# Altium PCB main.PcbDoc
Units mm, origin at the board's own origin, x right, y up, seen from the top; angles counter-clockwise.
Board outline 81 x 69.5 mm, 2 copper layers (Top Layer, Bottom Layer); 105 components, 70 nets, 326 pads, 352 vias.
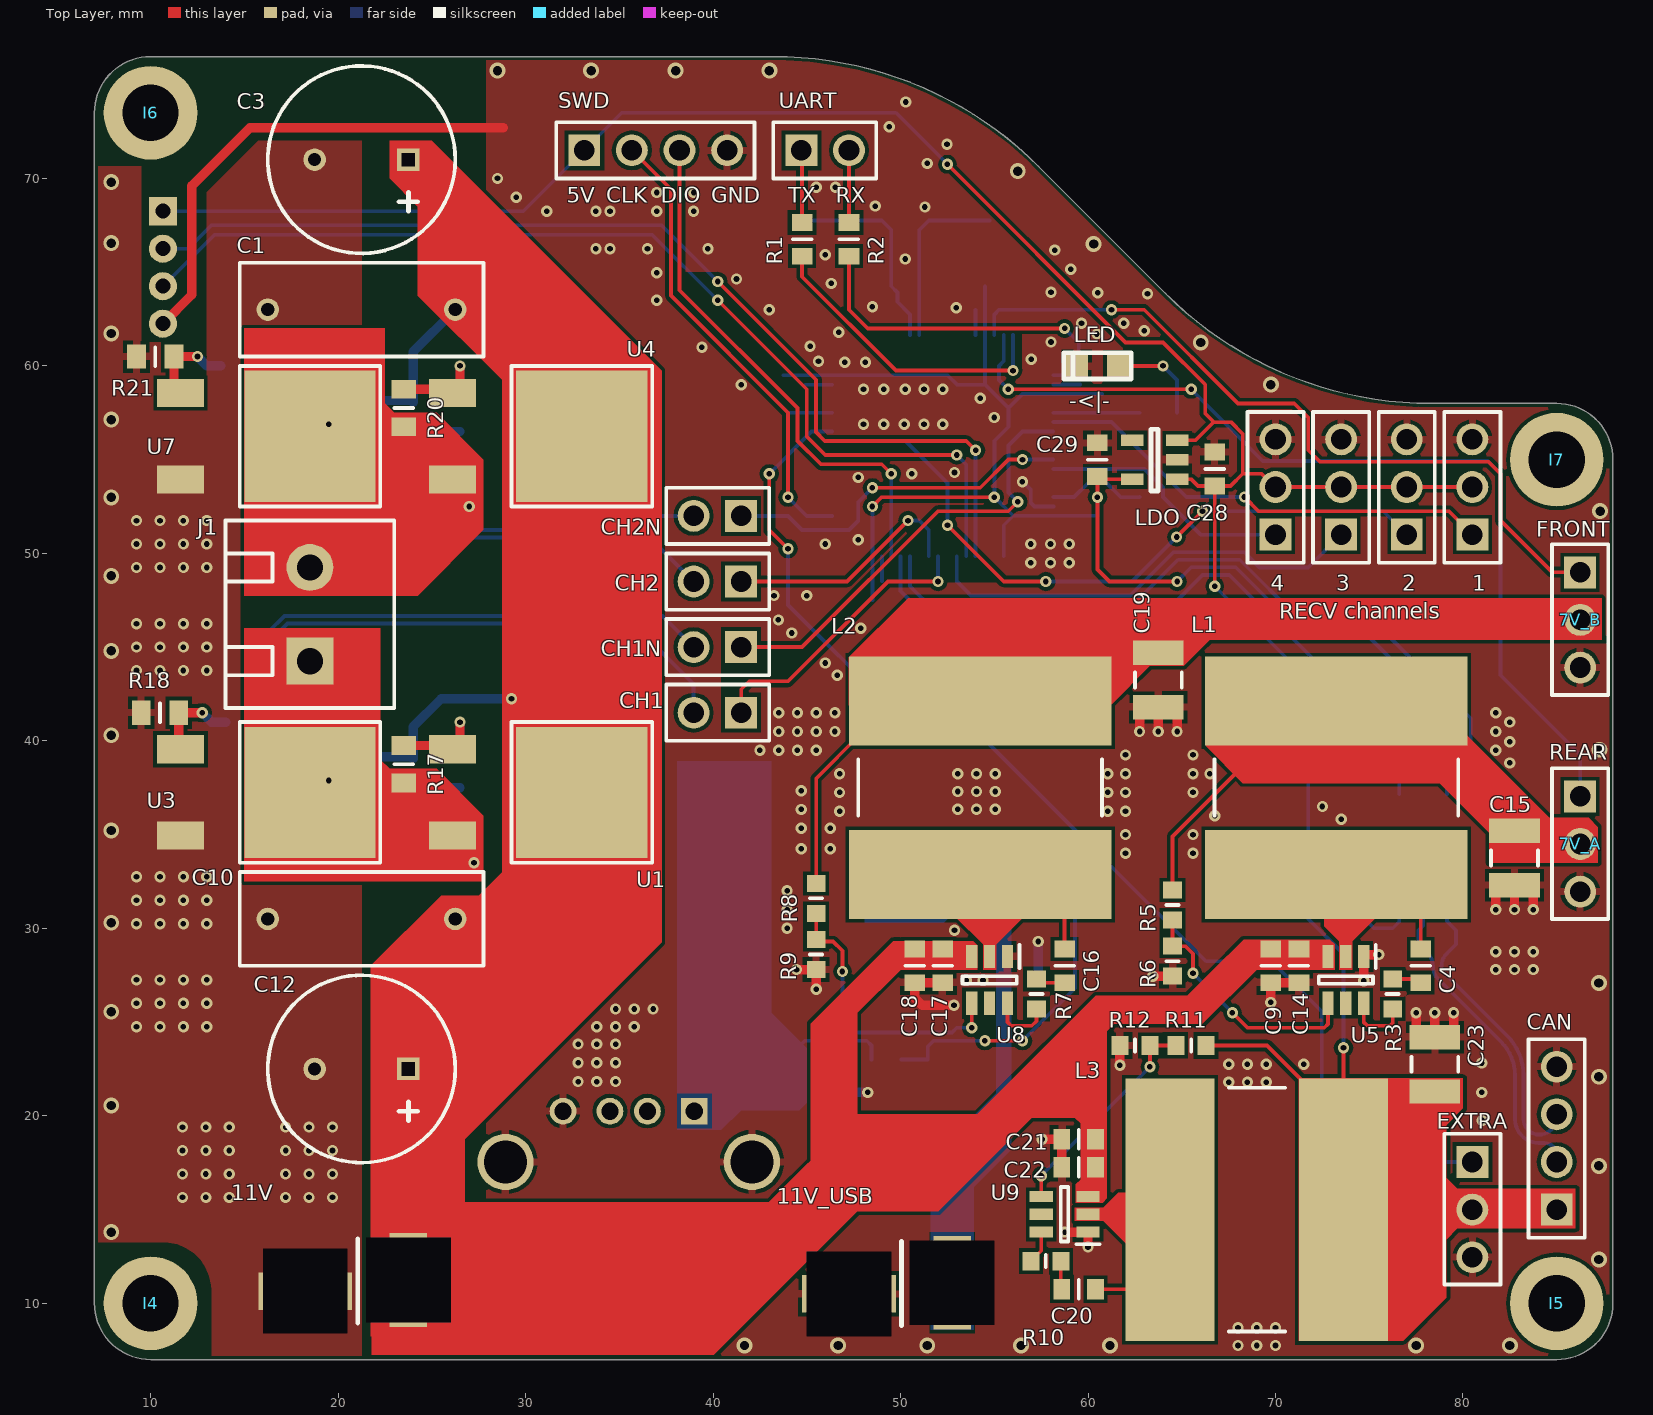
[diagram p0: Top Layer view]
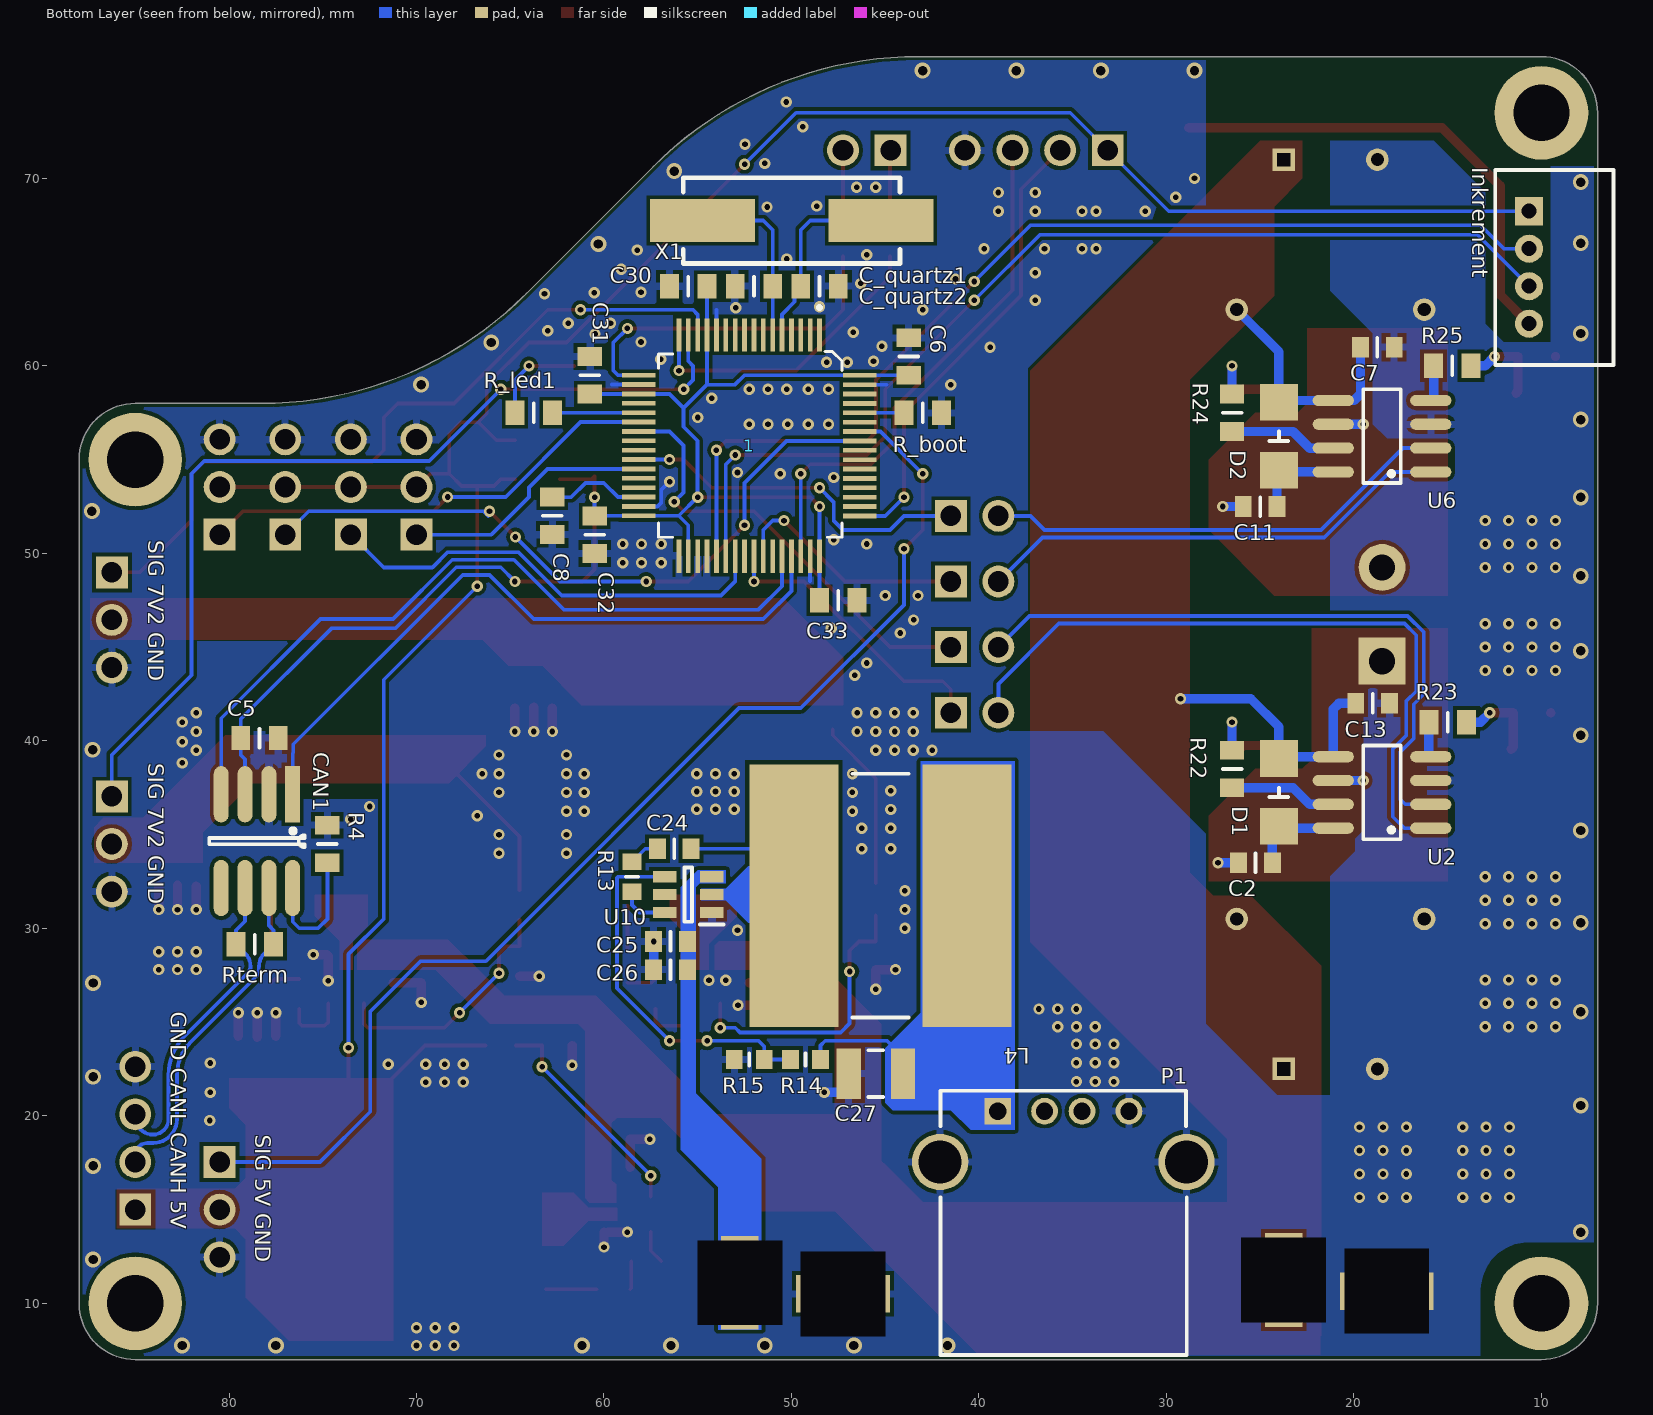
[diagram p1: Bottom Layer view, seen from below]

## Layer stack, top to bottom
Top Solder: solder mask 0.0102, Solder Resist, Dk 3.5
Top Layer: signal copper 0.0356
Dielectric 1: dielectric 0.32, FR-4, Dk 4.8
Bottom Layer: signal copper 0.0356
Bottom Solder: solder mask 0.0102, Solder Resist, Dk 3.5

## Board outline
7,10 7,73.5 cw(c10,73.5) 10,76.5 43.22,76.5 cw(c43.22,56.5) 57.362,70.642 64.138,63.866 64.138,63.858 ccw(c78.28,78) 78.28,58 85,58 cw(c85,55) 88,55 88,10 cw(c85,10) 85,7 10,7 cw(c10,10)

## Design rules (kind name [scope] priority, off if disabled: settings)
BoardOutlineClearance [All] p1: gap=0.2 ignorepadtopadclearanceinfootprint=FALSE
Clearance [All] p1: gap=0.203 ignorepadtopadclearanceinfootprint=FALSE except(0.25: Arc-Hole Track-Hole SMDPad-Hole THPad-Hole Via-Hole Fill-Hole Poly-Hole Region-Hole Text-Hole)
ComponentClearance [All] p1: gap=0.127 collisioncheckmode=3 verticalgap=0.127 showdistances=TRUE
DiffPairsRouting [All] p1: maxlimit=0.3 minlimit=0.2 mostfreqgap=0.25 toplayer_minwidth=0.2 toplayer_maxwidth=0.203 toplayer_prefwidth=0.2 bottomlayer_minwidth=0.2 bottomlayer_maxwidth=0.203 bottomlayer_prefwidth=0.2 maxuncoupledlength=12.7
Height [All] p1: minheight=0 maxheight=1816.048 prefheight=12.7
HoleSize [All] p1: absolutevalues=TRUE maxlimit=6.3 minlimit=0.3 maxpercent=80.000 minpercent=20.000
HoleToHoleClearance [All] p1: gap=0.25 allowstackedmicrovias=FALSE
MinimumAnnularRing [All] p1: minimumring=0.076
MinimumSolderMaskSliver [All] p1: minsoldermaskwidth=0
PlaneClearance PlaneClearance_1 [All] p1: clearance=0.508
PlaneConnect PlaneConnectPowerPads [InPadClass('PowerPads')] p1: planeconnectstyle=Direct reliefexpansion=0.508 reliefentries=4 reliefconductorwidth=0.254 reliefairgap=0.254
PlaneConnect [All] p2: pad.planeconnectstyle=Relief pad.reliefexpansion=0.3 pad.reliefentries=4 pad.reliefconductorwidth=0.4 pad.reliefairgap=0.203 via.planeconnectstyle=Direct via.reliefexpansion=0.3 via.reliefentries=4 via.reliefconductorwidth=0.127 via.reliefairgap=0.127
PolygonConnect PolygonConnectPowerPads [All vs (InPadClass('PowerPads'))] p1: connectstyle=Direct reliefconductorwidth=0.254 reliefentries=4 polygonreliefangle="90 Angle" airgapwidth=0.254
PolygonConnect [All] p2: thpad.connectstyle=Relief thpad.reliefconductorwidth=0.4 thpad.reliefentries=4 thpad.polygonreliefangle="90 Angle" thpad.airgapwidth=0.203 smdpad.connectstyle=Relief smdpad.reliefconductorwidth=0.4 smdpad.reliefentries=4 smdpad.polygonreliefangle="90 Angle" smdpad.airgapwidth=0.203 via.connectstyle=Direct via.reliefconductorwidth=0.127 via.reliefentries=4 via.polygonreliefangle="90 Angle" via.airgapwidth=0.127
RoutingVias [All] p1: holewidth=0.3 width=0.6 viastyle="Through Hole" minholewidth=0.3 minwidth=0.6 maxholewidth=0.6 maxwidth=6.6
SilkToSilkClearance [All] p1: silktosilkclearance=0
SilkToSolderMaskClearance [IsPad] p1: minsilkscreentomaskgap=0.127 clearancetoexposedcopper=TRUE
SolderMaskExpansion [All] p1: expansion=0.075 istentingtop=FALSE
Width [All] p1: maxlimit=25.4 minlimit=0.2 preferedwidth=0.2 minimp=50.000000 maximp=50.000000 favimp=50.000000
20 further rules are at their usual default settings.

## Classes and differential pairs
pad class PowerPads: 11V-2 C1-1 C3-2 C10-1 C12-2 U3-S U7-S
component class "Room Definition 2": C20 C21 C22 C23 L3 R10 R11 R12 U9
component class "Room Definition 1": C24 C25 C26 C27 L4 R13 R14 R15 U10
component class power: 7V_A 7V_B 11V 11V_USB C4 C9 C14 C15 C16 C17 C18 C19 C20 C21 C22 C23 C24 C25 C26 C27 C28 C29 EXTRA L1 L2 L3 L4 LDO P1 R3 R5 R6 R7 R10 R11 R12 R13 R14 R15 U5 U8 U9 U10
component class microcontroller-pinout-motor-controller: C5 C6 C8 C30 C31 C32 C33 C_quartz1 C_quartz2 CAN CAN1 LED R4 R_boot R_led1 Rterm X1
component class main: 2 3 4 C1 C2 C3 C7 C10 C11 C12 C13 CH1 CH1N CH2 CH2N D1 D2 Inkrement J1 R1 R2 R17 R18 R20 R21 R22 R23 R24 R25 SWD U1 U2 U3 U4 U6 U7 UART
differential pair CANH: +CANH_P -CANH_N

## Components (designator, comment, footprint, x,y, rotation, side; value= is the part's Value field where it differs from the comment)
1 "64-pin STM32F4 chip with symbol for Foxcar Control Board v1." LQFP64 52.25,55.75 r0 bottom
1 "3-Pin HEADER" "3-Pin HEADER" 80.5,51 r90 top (schematic designator RECV1)
2 "3-Pin HEADER" "3-Pin HEADER" 77,51 r90 top (schematic designator RECV2)
3 "3-Pin HEADER" "3-Pin HEADER" 73.5,51 r90 top (schematic designator RECV3)
4 "3-Pin HEADER" "3-Pin HEADER" 70,51 r90 top (schematic designator RECV4)
7V_A "3-Pin HEADER" "3-Pin HEADER" 86.25,37.04 r270 top
7V_B "3-Pin HEADER" "3-Pin HEADER" 86.25,48.99 r270 top
11V "T_PLUG" T_plug 23.75,11.25 r180 top
11V_USB "T_PLUG" T_plug 52.75,11.1 r180 top
C1 "R60DF4220506AJ" "10mm lead spacing CAP" 16.25,63 r0 top
C2 "VJ0805Y104JXATW1BC" 0805 25.25,33.5 r180 bottom
C3 "EEU-FR1V471" "5mm lead spacing ELCAP" 23.75,71 r180 top
C4 "C0805C104M5RACTU" 0805 77.75,28 r90 top
C5 "100nF" FP_0805_CAP_085 78.375,40.15 r0 bottom
C6 "100nF" FP_0805_CAP_085 43.75,60.5 r90 bottom
C7 "VJ0805Y105KXQTW1BC" 0805 18.75,61 r0 bottom
C8 "100nF" FP_0805_CAP_085 62.75,52.003 r90 bottom
C9 "GRM21BR61E106MA73L" 0805 69.75,28 r90 top
C10 "R60DF4220506AJ" "10mm lead spacing CAP" 16.25,30.5 r0 top
C11 "VJ0805Y104JXATW1BC" 0805 25,52.5 r180 bottom
C12 "EEU-FR1V471" "5mm lead spacing ELCAP" 23.75,22.5 r180 top
C13 "VJ0805Y105KXQTW1BC" 0805 19,42 r0 bottom
C14 "C0805C104M5RACTU" 0805 71.25,28 r90 top
C15 "TMK325B7226KMHP" 1210 82.75,33.75 r90 top
C16 "C0805C104M5RACTU" 0805 58.75,28 r90 top
C17 "GRM21BR61E106MA73L" 0805 52.25,28 r90 top
C18 "C0805C104M5RACTU" 0805 50.75,28 r90 top
C19 "TMK325B7226KMHP" 1210 63.75,43.25 r90 top
C20 "C0805C104M5RACTU" 0805 59.5,10.75 r0 top
C21 "GRM21BR61E106MA73L" 0805 59.5,18.75 r0 top
C22 "C0805C104M5RACTU" 0805 59.5,17.25 r0 top
C23 "TMK325B7226KMHP" 1210 78.5,22.75 r270 top
C24 "C0805C104M5RACTU" 0805 56.25,34.25 r180 bottom
C25 "GRM21BR61E106MA73L" 0805 56.45,29.3 r180 bottom
C26 "C0805C104M5RACTU" 0805 56.45,27.8 r180 bottom
C27 "TMK325B7226KMHP" 1210 45.5,22.25 r180 bottom
C28 "VJ0805Y105KXQTW1BC" 0805 66.75,54.5 r270 top
C29 "VJ0805Y105KXQTW1BC" 0805 60.5,55 r270 top
C30 "100nF" FP_0805_CAP_085 55.5,64.25 r180 bottom
C31 "100nF" FP_0805_CAP_085 60.75,59.5 r270 bottom
C32 "100nF" FP_0805_CAP_085 60.5,51 r90 bottom
C33 "100nF" FP_0805_CAP_085 47.5,47.5 r0 bottom
C_quartz1 "22pF" FP_0805_CAP_085 48.5,64.25 r0 bottom
C_quartz2 "22pF" FP_0805_CAP_085 52,64.25 r180 bottom
CAN "4-Pin Header" "4-Pin Header" 85,15 r90 top
CAN1 "CAN transceiver" SOIC-8 76.605,37.15 r270 bottom
CH1 "2-Pin Header" "2-Pin Header" 41.5,41.5 r180 top
CH1N "2-Pin Header" "2-Pin Header" 41.5,45 r180 top
CH2 "2-Pin Header" "2-Pin Header" 41.5,48.5 r180 top
CH2N "2-Pin Header" "2-Pin Header" 41.5,52 r180 top
D1 "SS32A" DO-214AC(SMA) 24,37.25 r90 bottom
D2 "SS32A" DO-214AC(SMA) 24,56.25 r90 bottom
EXTRA "3-Pin HEADER" "3-Pin HEADER" 80.5,17.54 r270 top (schematic designator 5V)
I4 "M3 screw drillhole" "3mm diameter drill"#1 0,0 r0 top
I5 "M3 screw drillhole" "3mm diameter drill"#2 7.62,0.127 r0 top
I6 "M3 screw drillhole" "3mm diameter drill"#3 23.368,6.477 r0 top
I7 "M3 screw drillhole" "3mm diameter drill"#4 40.005,10.541 r0 top
Inkrement "43-17-42" 43-17-42 10.656,68.25 r270 bottom
J1 "1935776" "PT 2,5/ 2-5,0-H" 18.5,44.25 r90 top
L1 "SDR1307-120ML" SDR1307 73.25,37.5 r180 top
L2 "SDR1307-120ML" SDR1307 54.25,37.5 r180 top
L3 "SDR1307-5R6ML" SDR1307 69,15 r90 top
L4 "SDR1307-5R6ML" SDR1307 45.25,31.75 r90 bottom
LDO "RT9013 LDO Voltage Regulator" RT9013_SOT23 64.75,53.96 r180 top (schematic designator LDO*)
LED "LED Red" FP_0805_LED_RED 61.5,60 r180 top (schematic designator LED1)
P1 "MC32593" MC32593 39,20.25 r180 bottom
R1 "CR0805-FX-20R0ELF" 0805 44.75,66.75 r90 top
R2 "CR0805-FX-20R0ELF" 0805 47.25,66.75 r90 top
R3 "RC0603FR-0730RL" 0603_RES 76.25,26.5 r90 top
R4 "47K" FP_0805_RES 74.75,34.5 r90 bottom
R5 "CRCW060380K6FKEA" 0603_RES 64.5,31.25 r90 top
R6 "CRCW060310K0FKEA" 0603_RES 64.5,28.25 r90 top
R7 "RC0603FR-0730RL" 0603_RES 57.25,26.5 r90 top
R8 "CRCW060380K6FKEA" 0603_RES 45.5,31.6 r90 top
R9 "CRCW060310K0FKEA" 0603_RES 45.5,28.6 r90 top
R10 "RC0603FR-0730RL" 0603_RES 57.75,12.25 r0 top
R11 "CRCW060352K3FKEA" 0603_RES 65.5,23.75 r0 top
R12 "CRCW060310K0FKEA" 0603_RES 62.5,23.75 r0 top
R13 "RC0603FR-0730RL" 0603_RES 58.5,32.75 r90 bottom
R14 "CRCW060352K3FKEA" 0603_RES 49.25,23 r180 bottom
R15 "CRCW060310K0FKEA" 0603_RES 52.25,23 r180 bottom
R17 "10K" FP_0805_RES 23.5,38.75 r270 top
R18 "10K" FP_0805_RES 10.5,41.5 r180 top
R20 "10K" FP_0805_RES 23.5,57.75 r270 top
R21 "10K" FP_0805_RES 10.25,60.5 r180 top
R22 "2R2" FP_0805_RES 26.5,38.5 r90 bottom
R23 "2R2" FP_0805_RES 15,41 r0 bottom
R24 "2R2" FP_0805_RES 26.5,57.5 r90 bottom
R25 "2R2" FP_0805_RES 14.75,60 r0 bottom
R_boot "10K" FP_0805_RES 43,57.497 r0 bottom
R_led1 "1K" FP_0805_RES 63.75,57.5 r0 bottom
Rterm "120R" FP_0805_RES 78.625,29.15 r0 bottom
SWD "4-Pin Header" "4-Pin Header" 33.13,71.5 r0 top
U1 "IRLR8743TRLPBF" "TO-252 (DPAK)" 33,37.25 r270 top
U2 "IRS2186STRPBF" "8-Pin SOIC" 18.5,37.25 r0 bottom
U3 "IRLR8743TRLPBF" "TO-252 (DPAK)" 18.5,37.25 r270 top
U4 "IRLR8743TRLPBF" "TO-252 (DPAK)" 33,56.25 r270 top
U5 "TPS56339" SOT-23-Thin-6 73.75,27.25 r270 top
U6 "IRS2186STRPBF" "8-Pin SOIC" 18.5,56.25 r0 bottom
U7 "IRLR8743TRLPBF" "TO-252 (DPAK)" 18.5,56.25 r270 top
U8 "TPS56339" SOT-23-Thin-6 54.75,27.25 r270 top
U9 "TPS56339" SOT-23-Thin-6 58.75,14.75 r180 top
U10 "TPS56339" SOT-23-Thin-6 55.5,31.8 r0 bottom
UART "2-Pin HEADER" "2-Pin Header" 44.71,71.5 r0 top
X1 "8MHz" FP_CRYSTAL_HC49_SMD 45.225,67.75 r0 bottom

## Footprints (in the part's own frame and the unit in brackets; to place one, negate y for a bottom-side part, rotate by r counter-clockwise, add the part's x,y. Pads: shape width x height; smd on the part's side, far side on the other; paste and mask are expansions set on the pad)
"2-Pin Header" [mm]
  rect 1.7x1.7 hole 1.1 mask+0.035: 1(0,0)
  round 1.7 hole 1.1 mask+0.035: 2(2.54,0)
  silkscreen extent -1.5,-1.5 4,1.5, body extent -1.27,-1.24 3.81,1.25, height 8.54
"3-Pin HEADER" [mm]
  rect 1.7x1.7 hole 1.1 mask+0.035: 1(0,0)
  round 1.7 hole 1.1 mask+0.035: 2(2.54,0) 3(5.08,0)
  silkscreen extent -1.5,-1.5 6.54,1.5, body extent -1.27,-1.24 6.35,1.25, height 8.54
"3mm diameter drill"#1 [mm]
  round 5 hole 3: 0(10,10)
"3mm diameter drill"#2 [mm]
  round 5 hole 3: 0(77.38,9.873)
"3mm diameter drill"#3 [mm]
  round 5 hole 3: 0(-13.368,67.023)
"3mm diameter drill"#4 [mm]
  round 5 hole 3: 0(44.995,44.459)
"4-Pin Header" [mm]
  rect 1.7x1.7 hole 1.1 mask+0.035: 1(0,0)
  round 1.7 hole 1.1 mask+0.035: 2(2.54,0) 3(5.08,0) 4(7.62,0)
  silkscreen extent -1.5,-1.5 9.08,1.5, body extent -1.27,-1.24 8.89,1.25, height 8.54
"5mm lead spacing ELCAP" [mm]
  rect 1.2x1.2 hole 0.7 square: 1(0,0)
  round 1.2 hole 0.7: 2(5,0)
  silkscreen extent -2.5,-5 7.5,5, body extent -2.53,-5.03 7.53,5.03, height 16.53
"8-Pin SOIC" [mm] "Narrow body"
  oval 2.2x0.6 smd mask+0.035: 1(-2.6,1.905) 2(-2.6,0.635) 3(-2.6,-0.635) 4(-2.6,-1.905) 5(2.6,-1.905) 6(2.6,-0.635) 7(2.6,0.635) 8(2.6,1.905)
  silkscreen extent -1,-2.5 1,2.5, body extent -3,-2.45 3,2.45, height 1.7
"10mm lead spacing CAP" [mm]
  round 1.2 hole 0.7: 1(0,0) 2(10,0)
  silkscreen extent -1.5,-2.5 11.5,2.5, body extent -1.6,-2.63 11.6,2.58, height 12.05
43-17-42 [mm]
  rect 1.5x1.5 hole 0.8 mask+0.035: 1(0,0)
  round 1.5 hole 0.8 mask+0.035: 2(2,0) 3(4,0) 4(6,0)
  silkscreen extent -2.2,-1.8 8.2,4.5
0603_RES [mm]
  rect 0.9x1 smd: 1(-0.8,0) 2(0.8,0)
  silkscreen extent 0,-0.33 0,0.33, body extent -0.8,-0.43 0.8,0.43, height 0.55
0805 [mm]
  rect 0.9x1.1 smd mask+0.035: 1(-0.9,0) 2(0.9,0)
  silkscreen extent 0,-0.5 0,0.5, body extent -1,-0.6 1,0.6, height 1.2
1210 [mm]
  rect 1.3x2.7 smd mask+0.035: 1(-1.45,0) 2(1.45,0)
  silkscreen extent -0.4,-1.25 0.4,1.25, body extent -1.6,-1.25 1.6,1.25, height 2.5
DO-214AC(SMA) [mm]
  rect 1.96x2.04 smd mask+0.035: A(1.81,0) K(-1.81,0)
  silkscreen extent -0.25,-0.5 0.25,0.5, body extent -2.6,-1.3 2.6,1.3, height 2.35
FP_0805_CAP_085 [mm] "0805 kapacitás YAGEO 0.85mm magas"
  rect 1x1.3 smd: 1(-1,0) 2(1,0)
  silkscreen extent 0,-0.5 0,0.5, body extent -1,-0.64 1.03,0.64, height 0.85
FP_0805_LED_RED [mm] "0805 méretû piros LED"
  rect 1.2x1.3 smd: A(-0.1,0) K(2.1,0)
  silkscreen extent -0.8,-0.7 2.8,0.7, body extent 0.01,-0.63 2.03,0.62, height 1.1
FP_0805_RES [mm] "0805 ellenállás"
  rect 1x1.3 smd: 1(-1,0) 2(1,0)
  silkscreen extent 0,-0.5 0,0.5, body extent -1,-0.62 1,0.63, height 0.62
FP_CRYSTAL_HC49_SMD [mil] "HC49/SMD"
  rect 220x90 smd: 1(0,0) 2(375,0)
  silkscreen extent -40,-90 415,90, body extent -57,-90 432,90, height 130
LQFP64 [mil]
  rect 10x70 smd: 1(-147.5,-232.34) 2(-127.82,-232.34) 3(-108.13,-232.34) 4(-88.45,-232.34) 5(-68.76,-232.34) 6(-49.08,-232.34) 7(-29.39,-232.34) 8(-9.71,-232.34) 9(9.98,-232.34) 10(29.66,-232.34) 11(49.35,-232.34) 12(69.03,-232.34) 13(88.72,-232.34) 14(108.4,-232.34) 15(128.09,-232.34) 16(147.77,-232.34) 33(147.77,232.34) 34(128.09,232.34) 35(108.4,232.34) 36(88.72,232.34) 37(69.03,232.34) 38(49.35,232.34) 39(29.66,232.34) 40(9.98,232.34) 41(-9.71,232.34) 42(-29.39,232.34) 43(-49.08,232.34) 44(-68.76,232.34) 45(-88.45,232.34) 46(-108.13,232.34) 47(-127.82,232.34) 48(-147.5,232.34)
  rect 70x10 smd: 17(232.34,-147.77) 18(232.34,-128.09) 19(232.34,-108.4) 20(232.34,-88.72) 21(232.34,-69.03) 22(232.34,-49.35) 23(232.34,-29.66) 24(232.34,-9.98) 25(232.34,9.71) 26(232.34,29.39) 27(232.34,49.08) 28(232.34,68.76) 29(232.34,88.45) 30(232.34,108.13) 31(232.34,127.82) 32(232.34,147.5) 49(-232.34,147.78) 50(-232.34,128.09) 51(-232.34,108.41) 52(-232.34,88.72) 53(-232.34,69.04) 54(-232.34,49.35) 55(-232.34,29.67) 56(-232.34,9.98) 57(-232.34,-9.7) 58(-232.34,-29.39) 59(-232.34,-49.07) 60(-232.34,-68.76) 61(-232.34,-88.44) 62(-232.34,-108.13) 63(-232.34,-127.81) 64(-232.34,-147.5)
  silkscreen extent -194,-292 191,193
MC32593 [mm]
  round 3 hole 2.3: 0(-3.07,-2.71) 0(10.07,-2.71)
  rect 1.428x1.428 hole 0.92: 1(0,0)
  round 1.428 hole 0.92: 2(2.5,0) 3(4.5,0) 4(7,0)
  silkscreen extent -3.05,-13.01 10.09,1.09
"PT 2,5/ 2-5,0-H" [mm]
  rect 2.5x2.5 hole 1.4: 1(0,0)
  round 2.5 hole 1.4: 2(5,0)
  silkscreen extent -2.5,-4.5 7.5,4.5, body extent -2.5,-4.5 7.5,4.5, height 13.55
RT9013_SOT23 [mm] "RT9013 LDO Voltage Regulator"
  rect 1.2x0.6 smd: EN(0,-2.08) GND(0,-1.04) NC(2.4,-2.08) Vin(0,0) Vout(2.4,0)
  silkscreen extent 1.02,-2.67 1.4,0.64
SDR1307 [mm]
  rect 14x4.75 smd: 1(0,4.625) 2(0,-4.625)
  silkscreen extent -6.5,-1.5 6.5,1.5
SOIC-8 [mm]
  rect 3x0.8 smd: 1(0,0)
  oval 3x0.8 smd: 2(0,-1.27) 3(0,-2.54) 4(0,-3.81) 5(5,-3.81) 6(5,-2.54) 7(5,-1.27) 8(5,0)
  silkscreen extent 1.83,-4.45 2.82,0.63
SOT-23-Thin-6 [mm]
  rect 1.25x0.6 smd: 1(-1.25,0.95) 2(-1.25,0) 3(-1.25,-0.95) 4(1.25,-0.95) 5(1.25,0) 6(1.25,0.95)
  silkscreen extent -1.88,-1.45 0.2,1.6, body extent -1.4,-1.45 1.4,1.45, height 1.1
T_plug [mm]
  rect 2x5 hole 4.5 square: 1(0,0)
  rect 5x2 hole 4.5 square: 2(5.5,0.6)
  silkscreen extent 2.7,-2.2 2.7,2.3
"TO-252 (DPAK)" [mm]
  rect 7x7 smd mask+0.035: D(0,0)
  rect 1.5x2.5 smd mask+0.035: G(-2.3,-6.9) S(2.3,-6.9)
  silkscreen extent -3.75,-3.75 3.75,3.75, body extent -3.37,-6.78 3.37,3.32, height 2.37

## Part data
1: library part STM32F4R_64PIN_FOXCAR, Package=LQFP64, DeviceSetName=STM32F4R_64PIN_FOXCAR, GateName_1=G$1, LibraryName=stm32f4, SymbolName_1=STM32F4_64PINS_FOXCARV1
11V 11V_USB: "LiPo battery T plug connector"
C1 C10: "General Purpose Metallized Polyester Film Capacitor, 2.2 uF, 40 VAC, 63 VDC , 5 %", Capacitance=2.2uF
C2 C11: "SMD Multilayer Ceramic Capacitor, 0805 [2012 Metric], 0.1 µF, 50 V, ± 5%, X7R, VJ Series", Capacitance=0.1uF
C3 C12: "Aluminum Electrolytic Capacitors, 470uF, Low ESR", Capacitance=470uF
C4 C14 C16 C18 C20 C22 C24 C26: "Multilayer Ceramic Capacitors MLCC - SMD/SMT 50V 0.1uF X7R 0805 20%", Capacitance=0.1uF
C5 C6 C8 C30 C31 C32 C33: library part "CAP 100nF", "Capacitor", Tolerance=+80%/-20%, Voltage=25V, Name="SMD Multilayer Ceramic Capacitor, 0805", Reference=1759167, Supplier=Farnell
C7 C13 C28 C29: "SMD Multilayer Ceramic Capacitor, 0805 [2012 Metric], 1 µF, 10 V, ± 10%, X7R, VJ Series", Capacitance=1uF
C9 C17 C21 C25: "Multilayer Ceramic Capacitors MLCC - SMD/SMT 0805 10uF 25volts X5R 20%", Capacitance=10uF
C15 C19 C23 C27: "Multilayer Ceramic Capacitors MLCC - SMD/SMT 1210 25V 22uF 10% X7R AEC-Q200", Capacitance=22uF
C_quartz1 C_quartz2: library part "CAP 22pF", "Capacitor", Tolerance=5%, Voltage=50V, Name="SMD Multilayer Ceramic Capacitor, 0805", Reference=1759195, Supplier=Farnell
CAN1: library part SN65HVD230
CH1 CH1N CH2 CH2N: "TÜSKESOR 2 P SMD SPHSS220-B02-4/3 (T-T) 2mm PIN 0.5x0.5 TÖRDELHETÖ [ 43-10-37 ]"
D1 D2: "3A 40V DO-214AC SCH.RECT. SS34A (YET) SMA (SK34A;SX34) [ 83-02-56 ]"
I4 I5 I6 I7: "5mm diameter via with 3mm hole"
Inkrement: "TÁPCSATL. 2.00mm 4P APA 90° NCW200S-04R (G-S) FORR. [ 43-17-42 ]"
J1: "PCB terminal block, nominal current: 32 A, nom. voltage: 400 V, pitch: 5 mm, number of positions: 2"
L1 L2: "Fixed Inductors 12uH 20% SMD 1307", Inductance=12uH
L3 L4: "Fixed Inductors 5.6uH 20% SMD 1307", Inductance=5.6uF
LDO: library part RT9013, "LDO Voltage Regulator"
LED: "Red LED", I_max=20mA, Name="MULTICOMP  MCL-S270SRC  LED, Red, SMD, 1.25mm x 1.4mm, 20 mA, 1.85 V, 643 nm", Reference=1581239, Supplier=Farnell, U_fw=1.85V, Wavelength=643nm
P1: "USB Connector, USB Type A, USB 2.0, Receptacle, 4 Ways, Through Hole Mount, Right Angle"
R1 R2: "Thick Film Resistors - SMD 20ohm 1%", Resistance=20
R3 R7 R10 R13: "Thick Film Resistors - SMD 30 OHM 1%", Resistance=30
R4: library part "RES 47K", "Resistor", Power=125mW, Tolerance=5%, Name="YAGEO (PHYCOMP)  RC0805JR-0747KL  SMD Chip Resistor, Thick Film, 47 kohm", Reference=9234217, Supplier=Farnell
R5 R8: "Thick Film Resistors - SMD 1/10watt 80.6Kohms 1%", Resistance=80K6
R6 R9 R12 R15: "Thick Film Resistors - SMD 1/10watt 10Kohms 1%", Resistance=10K
R11 R14: "Thick Film Resistors - SMD 1/10watt 52.3Kohms 1%", Resistance=52.3K
R17 R18 R20 R21 R_boot: library part "RES 10K", "Resistor", Power=125mW, Tolerance=5%, Name="YAGEO (PHYCOMP)  RC0805JR-0710KL  SMD Chip Resistor, Thick Film, 10 kohm", Reference=9234136, Supplier=Farnell
R22 R23 R24 R25: library part "RES 2R2", "Resistor", Power=125mW, Tolerance=5%, Reference=2671001, Supplier=Farnell
R_led1: library part "RES 1K", "Resistor", Power=125mW, Tolerance=5%, Name="YAGEO (PHYCOMP)  RC0805JR-071KL  SMD Chip Resistor, Thick Film, 1 kohm", Reference=9234004, Supplier=Farnell
Rterm: library part "RES 120R", "Resistor", Power=125mW, Tolerance=5%, Name="YAGEO (PHYCOMP)  RC0805JR-07120RL  SMD Chip Resistor, Thick Film, 120 ohm", Reference=9233890, Supplier=Farnell
U1 U3 U4 U7: "HEXFET2Power MOSFET, Vdss=30V, Rdson=3.1mOhm, Qg=39nC, Id=160A"
U2 U6: "High and Low Side Driver"
U5 U8 U9 U10: "4.5-V to 24-V Input, 3-A Output Synchronous Buck Converter"
X1: library part Crystal, "Quarz Crystal"

## Via types
v1: diameter 0.6, hole 0.3, Top Layer to Bottom Layer, tented both sides, 262 vias
v2: diameter 0.6, hole 0.3, Top Layer to Bottom Layer, 56 vias
v3: diameter 0.85, hole 0.5, Top Layer to Bottom Layer, tented both sides, 34 vias

## Nets (pads, with @x,y where several pads share a name; then routed paths per layer and width w, separated by ;. In a path a pad name is that pad's centre, name@x,y a point inside that pad or via, vN(x,y) a via of type N, cw(c..) or ccw(c..) an arc to the next point about the centre after c; other vN are vias at no path point)
3V3: 1.13 1.19 1.32 1.34 1.48 1.64 C5.2 C6.1 C29.2 C30.2 C31.2 C32.2 C33.2 CAN1.3 LDO.Vout | length 83.1
  Top Layer w0.2: v1(48.5,52.5) 49,53 v1(55,53) ; LDO.Vout 60.64,53.96 C29.2 v1(60.5,53) 60.5,49.14 61.14,48.5 v1(64.75,48.5)
  Bottom Layer w0.2: C6.1 43.754,59.496 1.64 52.507,59.496 53.003,59 54.503,59 ; C33.2 48.5,49.845 1.48 48.5,49.852 v1(48.5,52.5) ; C30.2 54.503,64.247 1.13 54.503,59 ; v1(55,53) v1@55.005,53.005 ; 1.34 55.503,51.5 56.007,52.003 ; v1(60.5,53) C32.2 60.497,52.003 1.32 56.007,52.003 ; C31.2 60.747,58.503 1.19 56.507,58.503 55.753,57.75 ; v1(64.75,48.5) 65.506,49.256 67.88,49.256 71.137,46 74.54,46 79.375,41.165 C5.2 79.375,39.25 79.145,39.02 CAN1.3 ; 54.503,59 55.753,57.75 ; v1@55.005,53.005 55.005,56.003 55.753,56.752 55.753,57.75 ; v1@55.005,53.005 56.007,52.003
5V: 1.2@80.5,53.54 2.2 3.2 4.2 C23.2 C28.2 CAN.1 EXTRA.2 Inkrement.1 L3.2 LDO.EN LDO.Vin R11.2 SWD.1 | length 136.5
  Top Layer w0.2: v1(52.5,70.75) 62,61.25 64,61.25 66.25,59 66.25,57.46 66.71,57 ; LDO.Vin 65.5,53.96 65.86,53.6 C28.2 ; LDO.EN 65.75,56.04 66.71,57 ; R11.2 69.55,23.75 L3.2@71.6,21.7 ; v1(66.756,48.25) 66.756,53.594 C28.2 ; L3.2@73.5,15.125 L3.2 v1(73.625,23.625) ; 1.2@80.5,53.54 2.2 3.2 4.2 69.959,53.54 69.249,54.25 68.25,54.25 ; 66.71,57 67.625,57 68.25,56.375 68.25,54.25 ; C28.2 67.6,53.6 68.25,54.25
  Bottom Layer w0.2: Inkrement.1 29.88,68.25 SWD.1 35.13,73.5 49.75,73.5 v1(52.5,70.75) ; v1(66.756,48.25) 71.75,43.256 71.75,30.5 73.625,28.625 v1(73.625,23.625)
5V_USB: C27.2 L4.2 P1.1 R14.2 | length 4.8
  Bottom Layer w0.2: 44.6,23.7 44.9,24 48.2,24 48.45,23.75 R14.2
7V2_A: 7V_A.2 C15.2 L1.2 R5.2 | length 7.8
  Top Layer w0.2: R5.2 64.5,34.9 68,38.4
7V2_B: 7V_B.2 C19.2 L2.2 R8.2 | length 9.2
  Top Layer w0.2: R8.2 45.5,38 47.8,40.3 L2.2@47.8,40.6
11V1: 11V.1 C1.2 C3.1 C7.2 C9.2 C10.2 C12.1 C13.2 C14.2 C17.2 C18.2 C21.2 C22.2 D1.A D2.A U1.D U2.5 U4.D U5.3 U6.5 U8.3 U9.3 | length 27.3
  Bottom Layer w0.5: C7.2 19.65,58.5 19.995,58.155 U6.5 23.905,58.155 D2.A 24,60.75 C1.2 ; C13.2 20.8,42 21.1,41.7 U2.5 23.905,39.155 D1.A 24,40.75 25.5,42.25 v1(29.25,42.25)
11V1_USB: 11V_USB.1 C25.2 C26.2 U10.3
CAN_RX: 1.44 CAN1.4 | length 40.7
  Bottom Layer w0.2: 1.44 50.503,48.247 51.75,47 62.147,47 64.806,49.66 68.09,49.66 71.25,46.5 75.125,46.5 80.415,41.21 CAN1.4
CAN_TX: 1.45 CAN1.1 | length 36.4
  Bottom Layer w0.2: 1.45 50.003,48 51.503,46.5 63.75,46.5 66.103,48.853 67.534,48.853 76.572,39.815 76.572,39.374 76.605,39.341 CAN1.1
CANH_N: CAN1.6 CAN.3 Rterm.2 | length 17.4
  Bottom Layer w0.203: CAN1.6 79.145,30.382 79.625,29.901 Rterm.2 79.135,28.66 ccw(c79.821,27.975) 78.852,27.975 ccw(c79.338,27.975) 78.994,27.631 82.351,24.274 cw(c80.235,22.157) 83.228,22.157 83.228,19.822 ccw(c84.05,19.822) 84.05,19 ccw(c84.05,19.95) 85,19.95 CAN.3
CANH_P: CAN1.7 CAN.2 Rterm.1 | length 18.1
  Bottom Layer w0.203: CAN1.7 77.875,30.151 77.625,29.901 Rterm.1 78.115,28.66 cw(c77.429,27.975) 78.399,27.975 ccw(c79.338,27.975) 78.674,27.311 82.031,23.953 cw(c80.235,22.157) 82.775,22.157 82.775,19.822 ccw(c84.05,19.822) 84.05,18.547 84.359,18.547 cw(c84.359,17.906) 85,17.906 CAN.2
ENCODER_A: 1.37 Inkrement.2 | length 56.1
  Top Layer w0.2: v1(40.25,64.5) 45.484,59.266 45.484,56.469 45.953,56 53.503,56 v1(54.003,55.5)
  Bottom Layer w0.2: Inkrement.2 12,66.25 13.25,67.5 37.25,67.5 v1(40.25,64.5) ; 1.37 v1(54.003,55.5)
ENCODER_B: 1.38 Inkrement.3 | length 55.4
  Top Layer w0.2: v1(40.25,63.5) 45,58.75 45,56.234 45.984,55.25 v1(53,55.25)
  Bottom Layer w0.2: Inkrement.3 13.406,67 36.75,67 v1(40.25,63.5) ; v1(53,55.25) 53.503,54.747 1.38
EXTRA_SERVO: 1.58 EXTRA.1 | length 63.6
  Top Layer w0.2: v1(43,54.25) 43,51.25 v1(44,50.25)
  Bottom Layer w0.2: v1(43,54.25) 43.003,54.25 45.25,56.497 1.58 ; v1(44,50.25) 44,47.25 49.5,41.75 52.8,41.75 66.3,28.25 69.79,28.25 72.468,25.572 72.468,20.218 75.145,17.54 EXTRA.1
FRONT_SERVO: 1.14 7V_B.1 | length 40.7
  Top Layer w0.2: v1(61.25,63) 63,63 68,58 71,58 71.75,57.25 71.75,55.5 72.367,54.883 81.367,54.883 82,54.25 82,51.75 84.75,49 86.24,49 7V_B.1
  Bottom Layer w0.2: 1.14 55.003,62.747 55.257,63 v1(61.25,63)
GND: 1.3@80.5,56.08 1.12 1.18 1.31 1.33 1.35 1.36 1.47 1.63 2.3 3.3 4.3 7V_A.3 7V_B.3 11V.2 11V_USB.2 C1.1 C3.2 C5.1 C6.2 C7.1 C8.1 C9.1 C10.1 C12.2 C13.1 C14.1 C15.1 C17.1 C18.1 C19.1 C21.1 C22.1 C23.1 C25.1 C26.1 C27.1 C28.1 C29.1 C30.1 C31.1 C32.1 C33.1 C_quartz1.1 C_quartz2.1 CAN1.2 CAN.4 EXTRA.3 Inkrement.4 LDO.GND LED.K P1.0 P1.4 R4.2 R6.1 R9.1 R12.1 R15.1 R18.2 R21.2 R_boot.1 SWD.4 U2.3 U3.S U5.1 U6.3 U7.S U8.1 U9.1 U10.1 | length 66
  Top Layer w0.5: Inkrement.4 12.2,63.794 12.2,69.6 15.3,72.7 28.8,72.7 ; v1(44.45,27.8) R9.1 v1(45.5,26.75) ; C17.1 C18.1 50.75,26.3 51.15,25.9 v1(52.85,25.9) ; U8.1 U8.1@55.702,28.501 ; v1(57.55,18.75) C21.1 C22.1 ; v1(58.75,13.8) U9.1@59.8,13.8 ; v1(60,13) U9.1 ; v1(61.7,22.7) R12.1 ; v1(62.75,40.5) C19.1@62.75,41.75 ; v1(63.45,27.45) R6.1 ; v1(63.75,40.5) C19.1 ; v1(64.75,40.5) C19.1@64.75,41.75 ; v1(69.75,26.05) C9.1 C14.1 ; v1(74.7,27.2) U5.1 74.8,28.6 v1(75.5,28.6) ; C23.1@77.5,24.25 v1(77.5,25.5) ; C23.1 v1(78.5,25.5) ; C23.1@79.5,24.25 v1(79.5,25.5) ; v1(81.75,31) C15.1@81.75,32.25 ; v1(82.75,31) C15.1 ; v1(83.75,31) C15.1@83.75,32.25
  Bottom Layer w0.203: 44.932,58.996 1.63 ; 49.003,48.525 1.47 ; 1.12 54.003,62.997 ; v1(56.5,53.825) 56.95,53.375 56.95,52.691 57.137,52.503 1.31 ; 1.18 59.572,59.003
  Bottom Layer w0.5: C27.1@47,21.25 v1(48.25,21.25) ; C26.1 v1(57.35,29.3)
  other v1: 11.7,15.65 12.95,15.65 14.2,15.65 17.2,15.65 18.45,15.65 19.7,15.65 11.7,16.9 12.95,16.9 14.2,16.9 17.2,16.9 18.45,16.9 19.7,16.9 11.7,18.15 12.95,18.15 14.2,18.15 17.2,18.15 18.45,18.15 19.7,18.15 11.7,19.4 12.95,19.4 14.2,19.4 17.2,19.4 18.45,19.4 19.7,19.4 81.031,19.75 81,21.25 32.8,21.825 33.8,21.825 34.8,21.825 81,22.82 32.8,22.825 33.8,22.825 34.8,22.825 32.8,23.825 33.8,23.825 34.8,23.825 9.25,24.75 10.5,24.75 11.75,24.75 13,24.75 33.8,24.75 34.8,24.75 35.8,24.75 34.8,25.7 35.8,25.7 36.8,25.7 9.25,26 10.5,26 11.75,26 13,26 53.5,27.225 54.4,27.225 9.25,27.25 10.5,27.25 11.75,27.25 13,27.25 81.75,27.8 82.75,27.8 83.75,27.8 81.75,28.75 82.75,28.75 83.75,28.75 52.875,29.9 43.95,30 9.25,30.25 10.5,30.25 11.75,30.25 13,30.25 43.95,31 9.25,31.5 10.5,31.5 11.75,31.5 13,31.5 43.95,32 9.25,32.75 10.5,32.75 11.75,32.75 13,32.75 73.5,35.825 53.05,36.35 54.05,36.35 55.05,36.35 72.5,36.5 53.05,37.3 54.05,37.3 55.05,37.3 53.05,38.25 54.05,38.25 55.05,38.25 46.625,43.5 9.25,43.75 10.5,43.75 11.75,43.75 13,43.75 45.984,44.15 9.25,45 10.5,45 11.75,45 13,45 44.196,45.75 47.875,46 9.25,46.25 10.5,46.25 11.75,46.25 13,46.25 43.487,46.45 43.25,47.749 45,47.75 9.25,49.25 10.5,49.25 11.75,49.25 13,49.25 56.95,49.5 58,49.5 59,49.5 9.25,50.5 10.5,50.5 11.75,50.5 13,50.5 45.984,50.5 56.95,50.5 58,50.5 59,50.5 47.75,50.724 9.25,51.75 10.5,51.75 11.75,51.75 13,51.75 47.75,54.054 50.596,54.25 52.875,54.313 48.026,56.885 49.107,56.885 50.204,56.885 51.25,56.885 52.25,56.885 55,57.25 54.247,58.276 48.026,58.75 49.107,58.75 50.25,58.75 51.25,58.75 52.25,58.75 41.5,59 47.025,60.2 48.125,60.2 45.625,60.25 56.975,60.35 39.404,61 45.175,61.05 58.025,61.276 60.475,61.7 46.7,61.8 63,61.875 59.65,62.275 61.9,62.275 43,63 52.975,63.1 48.5,63.15 37,63.5 63.175,63.85 60.525,63.9 58.025,63.925 46.3,64.4 41.25,64.632 37,64.974 59.075,65.15 50.25,65.7 45.984,65.925 58.225,66.175 33.75,66.25 34.5,66.25 36.5,66.25 39.724,66.25 31.125,68.25 33.75,68.25 34.5,68.25 37,68.25 38.96,68.25 51.3,68.475 48.65,68.525 29.5,69 37,69.25 38.96,69.25 45.503,69.525 46.525,69.525 28.5,70 51.425,70.8 52.475,71.825 49.4,72.75 50.275,74.075
  other v2: 68,7.75 69,7.75 70,7.75 68,8.7 69,8.7 70,8.7 67.5,21.8 68.5,21.8 69.5,21.8 67.5,22.75 68.5,22.75 69.5,22.75 71.5,22.75 62,34 65.6,34 44.7,34.25 46.25,34.25 62,35 65.6,35 44.7,35.345 46.25,35.345 66.756,36 46.75,36.25 61.05,36.25 62,36.25 44.7,36.345 46.75,37.25 61.05,37.25 62,37.25 65.6,37.25 44.7,37.345 46.75,38.25 61.05,38.25 62,38.25 65.6,38.25 66.5,38.25 82.5,38.825 62,39.25 65.6,39.25 42.5,39.5 43.5,39.5 44.5,39.5 45.5,39.5 81.75,39.5 82.5,39.95 43.5,40.5 44.5,40.5 45.5,40.5 46.5,40.5 81.75,40.5 82.5,41 43.5,41.5 44.5,41.5 45.5,41.5 46.5,41.5 81.75,41.5
  other v3: 41.675,7.75 46.675,7.75 51.425,7.75 56.425,7.75 61.175,7.75 77.5,7.75 82.5,7.75 87.25,12.334 7.9,13.8 87.25,17.334 7.9,20.55 87.25,22.084 7.9,25.55 87.25,27.084 7.9,30.3 7.9,35.22 87.276,39.525 7.9,40.3 7.9,44.8 7.9,48.8 87.312,52.25 7.9,52.99 7.9,57.131 69.75,59 66.013,61.25 7.9,61.725 60.3,66.5 7.9,66.55 7.9,69.8 56.25,70.387 28.5,75.75 33.5,75.75 38,75.75 43,75.75
MOT+: C2.1 J1.1 R17.2 U1.S U2.6 U3.D | length 2.7
  Bottom Layer w0.5: v1(19.5,37.885) U2.6 ; C2.1 v1(27.25,33.5)
MOT-: C11.1 J1.2 R20.2 U4.S U6.6 U7.D | length 2.7
  Bottom Layer w0.5: v1(19.5,56.885) U6.6 ; C11.1 v1(27,52.5)
MOT_CH1: 1.41 CH1.1 | length 15.5
  Top Layer w0.2: CH1.1 41.5,42.75 41.925,43.175 44,43.175 49.325,48.5 v1(52,48.5)
  Bottom Layer w0.2: v1(52,48.5) 52.003,48.503 1.41
MOT_CH1_X: CH1.2 U2.1 | length 37.9
  Bottom Layer w0.2: U2.1 17.32,35.345 17.928,35.953 17.928,39.567 17.206,40.289 17.206,42.12 16.678,42.648 16.678,45.633 17.303,46.258 35.742,46.258 38.96,43.04 CH1.2
MOT_CH1N: 1.23 CH1N.1 | length 23.9
  Top Layer w0.2: CH1N.1 44.75,45 52,52.25 55.75,52.25 v1(56.25,52.75)
  Bottom Layer w0.2: v1(56.25,52.75) 55.753,53.247 55.753,55.75 56.507,56.503 1.23
MOT_CH1N_X: CH1N.2 U2.2 | length 34.9
  Bottom Layer w0.2: U2.2 17.265,36.615 17.525,36.875 17.525,39.4 16.803,40.122 16.803,41.953 16.275,42.481 16.275,45.8 17.136,46.661 37.299,46.661 CH1N.2
MOT_CH2: 1.42 CH2.1 | length 13
  Top Layer w0.2: CH2.1 47.15,48.5 v1(50.4,51.75)
  Bottom Layer w0.2: v1(50.4,51.75) 51,51.75 51.503,51.247 1.42
MOT_CH2_X: CH2.2 U6.1 | length 25.5
  Bottom Layer w0.2: U6.1 18.085,54.345 21.583,50.847 36.613,50.847 CH2.2
MOT_CH2N: 1.26 CH2N.1 | length 19.9
  Top Layer w0.2: v1(48.5,53.497) 54.247,53.497 55.753,55.003 ; 55.753,55.003 v1(56.507,55.003) 55.753,55.003
  Bottom Layer w0.2: CH2N.1 44,52 44.75,51.25 47.25,51.25 47.75,51.75 47.75,52.747 v1(48.5,53.497) ; v1(56.507,55.003) 1.26
MOT_CH2N_X: CH2N.2 U6.2 | length 25.2
  Bottom Layer w0.2: U6.2 17.385,55.615 21.75,51.25 36.5,51.25 37.25,52 CH2N.2
Net1_5: 1.5 C_quartz1.2 X1.1 | length 10.5
  Bottom Layer w0.2: X1.1 49,67.75 49.5,67.25 C_quartz1.2 49.833,63.917 49.833,63.417 50.503,62.747 1.5
Net1_6: 1.6 C_quartz2.2 X1.2 | length 9.6
  Bottom Layer w0.2: 1.6 51,61.655 C_quartz2.2 51,67.25 51.5,67.75 X1.2
Net1_21: 1.21 R_led1.1 | length 4.6
  Bottom Layer w0.2: 1.21 62.747,57.503 R_led1.1
Net1_30: 1.30 C8.2 | length 5.2
  Bottom Layer w0.2: 1.30 59.253,53.003 60.01,53.76 60.99,53.76 61.75,53 62.747,53 C8.2
Net1_60: 1.60 R_boot.2 | length 2.3
  Bottom Layer w0.2: R_boot.2 1.60
NetC2_2: C2.2 D1.K U2.8 | length 5
  Bottom Layer w0.5: U2.8 23.905,35.345 D1.K 24.35,35.09 C2.2
NetC4_1: C4.1 R3.2 | length 1.6
  Top Layer w0.2: R3.2 77.55,27.3 C4.1
NetC4_2: C4.2 L1.1 U5.2 | length 2.1
  Top Layer w0.2: C4.2 L1.1@77.75,31
NetC11_2: C11.2 D2.K U6.8 | length 4.9
  Bottom Layer w0.5: U6.8 D2.K@23.905,54.345 ; D2.K D2.K@23.905,54.345 ; C11.2 24.1,54.15 D2.K@23.905,54.345
NetC16_1: C16.1 R7.2 | length 1.6
  Top Layer w0.2: R7.2 57.45,27.1 C16.1
NetC16_2: C16.2 L2.1 U8.2 | length 2.3
  Top Layer w0.2: C16.2 L2.1@58.75,31.2
NetC20_1: C20.1 R10.2 | length 1.5
  Top Layer w0.2: R10.2 58.55,10.8 C20.1
NetC20_2: C20.2 L3.1 U9.2 | length 2.7
  Top Layer w0.2: C20.2 L3.1@63.1,10.75
NetC24_1: C24.1 R13.2 | length 1.6
  Bottom Layer w0.2: C24.1 57.8,34.25 R13.2
NetC24_2: C24.2 L4.1 U10.2 | length 3.3
  Bottom Layer w0.2: L4.1@52,34.25 C24.2
NetCAN1_8: CAN1.8 R4.1 | length 7
  Bottom Layer w0.2: R4.1 74.75,30.5 75.25,30 76.25,30 76.605,30.355 CAN1.8
NetLED1_1: LED.A R_led1.2 | length 5.2
  Top Layer w0.2: LED.A v1(64,60)
  Bottom Layer w0.2: v1(64,60) 64.75,59.25 R_led1.2
NetR1_2: R1.2 UART.1 | length 3.8
  Top Layer w0.2: R1.2 UART.1@44.75,71.46
NetR2_2: R2.2 UART.2 | length 3.8
  Top Layer w0.2: R2.2 UART.2
NetR3_1: R3.1 U5.6 | length 3.4
  Top Layer w0.2: U5.6 74.7,25 74.9,24.8 76.1,24.8 76.25,24.95 R3.1
NetR5_1: R5.1 R6.2 U5.4 | length 13.3
  Top Layer w0.2: R5.1 R6.2 65.2,29.05 65.6,28.65 v1(65.6,27.6) ; v1(67.7,25.5) 68.5,24.7 72.6,24.7 72.8,24.9 U5.4
  Bottom Layer w0.2: v1(65.6,27.6) v1(67.7,25.5)
NetR7_1: R7.1 U8.6 | length 3.4
  Top Layer w0.2: U8.6 55.7,25 55.9,24.8 57,24.8 57.25,25.05 R7.1
NetR8_1: R8.1 R9.2 U8.4 | length 15.4
  Top Layer w0.2: R8.1@45.5,30.7 45.5,29.3 46.4,29.3 46.9,28.8 v1(46.9,27.7) ; v1(53.8,24.7) U8.4
  Bottom Layer w0.2: v1(46.9,27.7) 46.9,24.921 47.374,24.447 52.747,24.447 53,24.7 v1(53.8,24.7)
NetR10_1: R10.1 U9.6 | length 1.8
  Top Layer w0.2: R10.1 57.5,12.8 U9.6
NetR11_1: R11.1 R12.2 U9.4 | length 11.9
  Top Layer w0.2: U9.4 v1(57.5,16.8) ; v1(63.3,22.62) R12.2 R11.1
  Bottom Layer w0.2: v1(57.5,16.8) 57.5,16.82 v1(63.3,22.62)
NetR13_1: R13.1 U10.6 | length 2.6
  Bottom Layer w0.2: U10.6 58.1,30.85 58.5,31.25 R13.1
NetR14_1: R14.1 R15.2 U10.4 | length 19.7
  Top Layer w0.2: v1(54.5,24) v1(56.5,24)
  Bottom Layer w0.2: R14.1 R15.2 51.45,23.7 51.75,24 v1(54.5,24) ; v1(56.5,24) 59.303,26.803 59.303,32.697 59.25,32.75 U10.4
NetR17_1: R17.1 R22.2 U1.G | length 5.8
  Top Layer w0.5: R17.1 25.9,39.75 U1.G 26.5,39.95 v1(26.5,41)
  Bottom Layer w0.5: R22.2 v1(26.5,41)
NetR18_1: R18.1 R23.1 U3.G | length 4.7
  Top Layer w0.5: U3.G 11.5,39.65 R18.1 v1(12.75,41.5)
  Bottom Layer w0.5: v1(12.75,41.5) 13.25,41 R23.1
NetR20_1: R20.1 R24.2 U4.G | length 5.8
  Top Layer w0.5: R20.1 25.9,58.75 U4.G 26.5,58.95 v1(26.5,60)
  Bottom Layer w0.5: R24.2 v1(26.5,60)
NetR21_1: R21.1 R25.1 U7.G | length 4.7
  Top Layer w0.5: U7.G@11.35,58.55 11.25,58.65 R21.1 v1(12.5,60.5)
  Bottom Layer w0.5: v1(12.5,60.5) 13,60 R25.1
NetR22_1: R22.1 U2.7 | length 5.8
  Bottom Layer w0.5: U2.7 22.365,36.615 23.25,37.5 R22.1
NetR23_2: R23.2 U2.4 | length 1.9
  Bottom Layer w0.5: U2.4 16,39.255 R23.2
NetR24_1: R24.1 U6.7 | length 5.8
  Bottom Layer w0.5: U6.7 22.365,55.615 23.25,56.5 R24.1
NetR25_2: R25.2 U6.4 | length 1.9
  Bottom Layer w0.5: R25.2 15.75,58.305 U6.4
RC_RECV1: 1.1@80.5,51 1.22 | length 24.8
  Top Layer w0.2: v1(68.34,53.006) 69.097,52.25 79.25,52.25 1.1@80.5,51
  Bottom Layer w0.2: 1.22 61.247,57.003 65.244,53.006 v1(68.34,53.006)
RC_RECV2: 1.57 2.1 | length 37.5
  Top Layer w0.2: v1(52.503,51.5) 55.503,48.5 v1(57.75,48.5) ; v1(64.724,50.871) v1(66.103,52.25)
  Bottom Layer w0.2: 1.57 50.267,55.997 52.503,53.76 v1(52.503,51.5) ; v1(57.75,48.5) 62.353,48.5 v1(64.724,50.871) ; v1(66.103,52.25) 66.103,52.067 66.17,52 66.42,52.25 75.75,52.25 2.1
RC_RECV3: 1.39 3.1 | length 24.2
  Bottom Layer w0.2: 1.39 53.003,48.497 53.75,47.75 62.25,47.75 64.563,50.063 68.34,50.063 69.153,49.25 71.75,49.25 3.1
RC_RECV4: 1.27 4.1 | length 13.6
  Bottom Layer w0.2: 1.27 63.007,54.503 64,53.51 64,53.006 66.006,51 4.1
REAR_SERVO: 1.15 7V_A.1 | length 50.3
  Top Layer w0.2: v1(55.75,58.75) v1(65.5,58.75)
  Bottom Layer w0.2: 1.15 55.503,60.253 55.25,60 55.25,59.25 v1(55.75,58.75) ; v1(65.5,58.75) 69.323,54.927 81.323,54.927 82,54.25 82,43.5 86.25,39.25 7V_A.1
SYS_SWCLK: 1.49 SWD.2 | length 24.7
  Top Layer w0.2: SWD.2 37.75,69.42 37.75,63.75 44,57.5 v1(44,52.997)
  Bottom Layer w0.2: v1(44,52.997) 45,51.997 1.49
SYS_SWDIO: 1.46 SWD.3 | length 28.2
  Top Layer w0.2: SWD.3 38.21,64.04 44.5,57.75 44.5,56 45.75,54.75 49,54.75 v1(49.5,54.25)
  Bottom Layer w0.2: v1(49.5,54.25) 49.503,54.247 1.46
UART_RX: 1.17 R2.1 | length 18.8
  Top Layer w0.2: R2.1 47.25,63 48.25,62 v1(58.75,62)
  Bottom Layer w0.2: 1.17 59.253,59.503 59.5,59.75 59.5,61.25 v1(58.75,62)
UART_TX: 1.16 R1.1 | length 16.3
  Top Layer w0.2: R1.1 44.75,64.75 49.75,59.75 v1(56,59.75)
  Bottom Layer w0.2: v1(56,59.75) 56.003,59.753 1.16
pads on no net: 1.1@48.503,61.651 1.2@49.003,61.651 1.3@49.503,61.651 1.4 1.7 1.8 1.9 1.10 1.11 1.20 1.24 1.25 1.28 1.29 1.40 1.43 1.50 1.51 1.52 1.53 1.54 1.55 1.56 1.59 1.61 1.62 CAN1.5 I4.0 I5.0 I6.0 I7.0 LDO.NC P1.2 P1.3 U5.5 U8.5 U9.5 U10.5

## Polygon pours and split planes (outlines as drawn)
GND on Top Layer "GND_L01_P008" (solid, remove dead copper, pour order 8): 27.9,7 27.9,76.5 43.22,76.5 cw(c43.22,56.5) 57.362,70.642 64.138,63.866 ccw(c78.29,78.004) 78.28,58 85,58 cw(c85,55) 88,55 88,10 cw(c85,10) 85,7
GND on Top Layer "GND_L01_P004" (solid, remove dead copper, pour order 4): 21.25,7 21.25,72 15.75,72 13,69.25 13,62.25 12,61.25 9.5,61.25 9.5,70.642 7,70.642 7,13.25 10.71,13.25 cw(c10.71,10.71) 13.25,10.71 13.25,7
no net on Top Layer "NONET_L01_P000" (solid, pour order 0): 19.75,72
GND on Bottom Layer "GND_L02_P010" (solid, remove dead copper, pour order 10): 27.9,24.9 24.1,21.1 13.25,21.1 13.25,7 27.9,7 85,7 ccw(c85,10) 88,10 88,55 ccw(c85,55) 85,58 78.28,58 cw(c78.29,78.004) 64.138,63.866 57.362,70.642 ccw(c43.22,56.501) 43.22,76.5 27.9,76.5
GND on Bottom Layer "GND_L02_P002" (solid, remove dead copper, pour order 2): 21.25,7 21.25,72 15.75,72 13,69.25 13,62.25 12,61.25 9.5,61.25 9.5,70.642 7,70.642 7,13.25 10.71,13.25 cw(c10.71,10.71) 13.25,10.71 13.25,7

## Other copper
Top Layer:
  pour cut-out: 87.15,45.193 87.793,45.193 88.025,45.425 87.825,45.625 87.625,45.625
  pour cut-out: 40.447,42.553 40.447,43.947 41.853,43.947 42.025,43.775
  pour cut-out: 52.363,48.45 55.153,48.45 55.353,48.65
  pour cut-out: 72,54.602 70,54.602 70,54.095 71.154,54.095
  pour cut-out: 71.441,55.75 71.441,53.75 71.948,53.75 71.948,54.904
  pour cut-out: 68.559,56 68.559,58 68.052,58 68.052,56.846
  pour cut-out: 56.5,59.853 56.5,61.853 55.993,61.853 55.993,60.699
  pour cut-out: 40.25,65 38.25,65 38.25,64.493 39.404,64.493
  pour cut-out: 13,59.308 13,62.5 12.493,62.5 12.493,60.5
  pour cut-out: 14.793,47.75 14.793,46 15.3,46 15.75,46.45
  region net 5V: 86,14 86,16.1 79.7,16.1 79.1,16.7 79.1,19.5 80,20.4 80,22 71.25,22 71.25,8 76.8,8 79.1,10.3 79.1,13.4 79.7,14
  region net 7V2_A: 87.2,33.5 87.2,35.4 86.7,35.9 84.6,35.9 80.2,40.3 66.3,40.3 66.3,39.7 68.25,37.75 78.75,37.75 81.4,35.1 81.4,33.5
  region net NetC4_2: 73.4,27.8 73.4,29.325 72.6,30.125 72.6,31.8 75.425,31.8 75.425,30.65 74.1,29.325 74.1,27.8
  region net NetC20_2: 59.3,15.1 60.825,15.1 61.625,15.9 63.3,15.9 63.3,13.075 62.15,13.075 60.825,14.4 59.3,14.4
  region net 7V2_B: 47.25,44.45 50.4,47.6 87.4,47.6 87.4,45.4 66.5,45.4 65.1,44 63.3,44 61.2,41.9 47.25,41.9
  region net NetC16_2: 54.4,27.8 54.4,29.15 52.925,30.625 52.925,31.8 56.5,31.8 56.5,30.55 55.1,29.15 55.1,27.8
  region net 11V1: 42.5,14.9 47.68,20.08 54.08,20.08 55.1,21.1 60.4,26.4 65.3,26.4 66.6,27.7 68.3,29.4 72.9,29.4 73.15,29.15 73.15,27.8 69,27.8 66.1,24.9 61.4,24.9 61,24.5 61,15.6 60.775,15.375 59.35,15.375 59.35,16.35 59.6,16.6 59.6,19.6 59.3,19.9 57,19.9 52,14.9
  region net 11V1: 54.1,27.8 54.1,29.1 53.875,29.325 49.605,29.325 45.2,24.92 45.2,17.6 43,15.4 21.8,15.4 21.8,7.25 40.05,7.25 47.7,14.9 47.7,25.5 50,27.8
  region net 11V1: 28.75,33 27.5,31.75 25.5,31.75 21.75,28 21.75,8.25 26.75,8.25 26.75,18.75 37.25,29.25 37.25,59.75 25,72 22.75,72 22.75,70 24.25,68.5 24.25,63.75 28.75,59.25
  region net MOT+: 15,32.5 15,46 22.25,46 22.25,39 22.75,38.5 25.25,38.5 27.75,36 27.75,32.5
  region: 15,33.75
  region net MOT-: 15,62 15,47.75 24.25,47.75 27.75,51.25 27.75,55 25.25,57.5 23,57.5 22.5,58 22.5,62
Bottom Layer:
  pour cut-out: 71.75,36.878 76.088,36.878 76.25,37.04
  pour cut-out: 76.75,40.5 76.75,40.87 76.883,41.003 78.672,41.003 78.672,40.5
  pour cut-out: 30.5,66.775 37.4,59.875 37.4,41.609 38.429,40.58 38.374,40.525 33.375,40.525 27.5,34.65 27.5,66.775
  pour cut-out: 76.725,45.3 81.825,45.3 81.825,46.275
  pour cut-out: 30.525,68.525 30.525,67.95 30.8,67.675
  pour cut-out: 14.587,55.615 14.587,54.345 15.1,54.858 15.1,55.102
  pour cut-out: 16.7,56.128 18.022,56.128 18.228,56.128 18.987,56.887 18.987,60.538 19.475,60.05 19.475,55.252
  pour cut-out: 18.997,61.753 21.369,64.125 21.8,64.125 21.8,62.225 21.05,61.475
  pour cut-out: 14.587,36.615 14.587,35.263 14.75,35.1
  pour cut-out: 16.1,37.525 16.1,37.128 16.225,37.003
  pour cut-out: 16.1,38.75 16.1,38.325 16.2,38.225
  pour cut-out: 19.475,37.475 19.475,35.225 19.925,34.775 19.925,34.1 21.55,32.475
  pour cut-out: 19.475,41.325 19.475,38.36 19.75,38.085 19.825,38.16 19.825,41.325
  region net 11V1_USB: 55.9,32.2 55,33.1 53.5,33.1 53.5,32.4 54.9,32.4 55.1,32.2 55.1,21.2 51.6,17.7 51.6,8.6 53.9,8.6 53.9,16.2 55.9,18.2
  region net NetC24_2: 48.1,33.3 48.1,30.3 52.3,30.3 53.5,31.5 54.8,31.5 54.8,32.1 53.5,32.1 52.3,33.3
  region net 5V_USB: 43.1,38.9 43.1,25.5 45,23.6 45,20.7 44.6,20.3 41.5,20.3 40.45,19.25 38.1,19.25 38.1,38.9

## Silkscreen, mask and mechanical layers (free items; w line width, h text height)
Top Overlay:
  text "5V" at 32.2,68.7 h0.83
  text "CLK" at 34.3,68.7 h0.83
  text "DIO" at 37.2,68.7 h0.83
  text "GND" at 39.9,68.7 h0.83
  text "TX" at 44,68.7 h0.83
  text "RX" at 46.54,68.7 h0.83
  text "-<|-" at 59.004,57.754 h0.83
  text "FRONT" at 83.9,50.9 h0.83
  text "RECV channels" at 70.2,46.5 h0.83
  text "REAR" at 84.6,39 h0.83
Bottom Overlay:
  text "SIG 7V2 GND" at 84.3,50.7 h0.83 r90
  text "SIG 7V2 GND" at 84.3,38.8 h0.83 r90
  text "GND CANL CANH 5V" at 83.1,25.55 h0.83 r90
  text "SIG 5V GND" at 78.6,19 h0.83 r90
Mechanical 1:
  the board outline again, w0.4